# EAGLE board fire alarm (EAGLE 6.5.0)
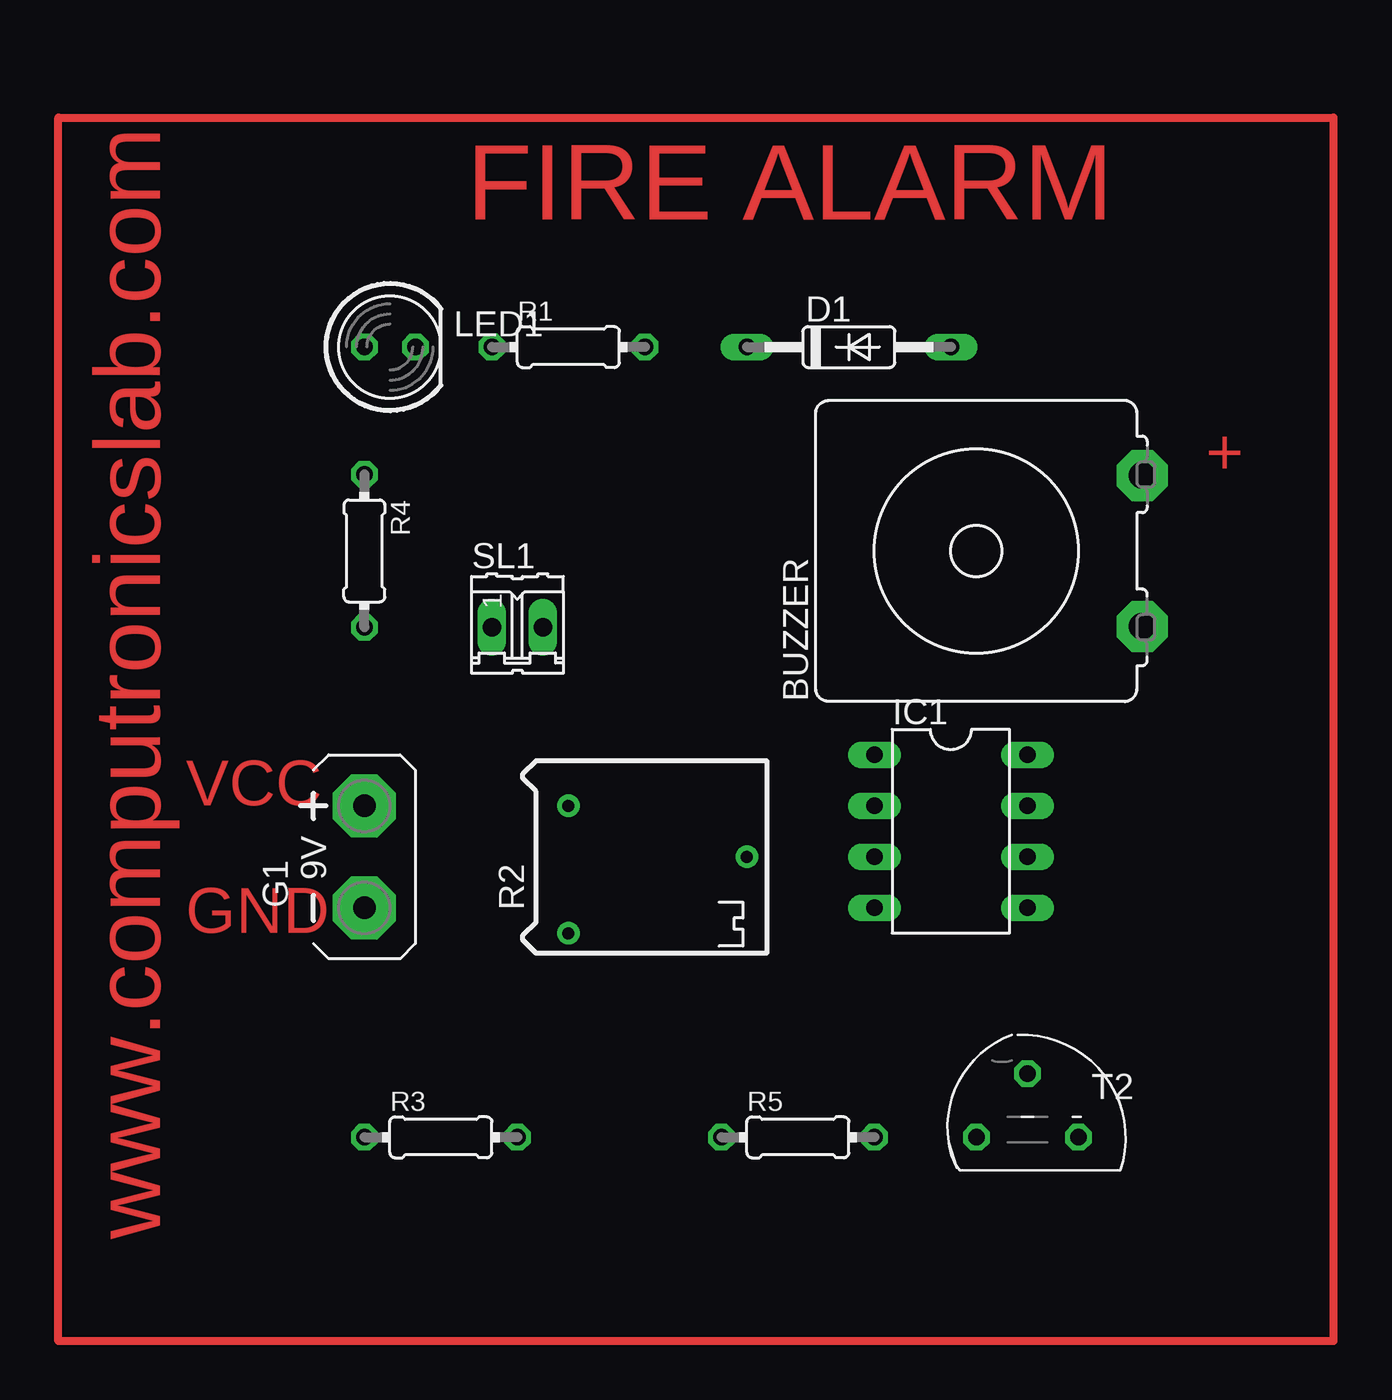
[diagram p0: board, top side]
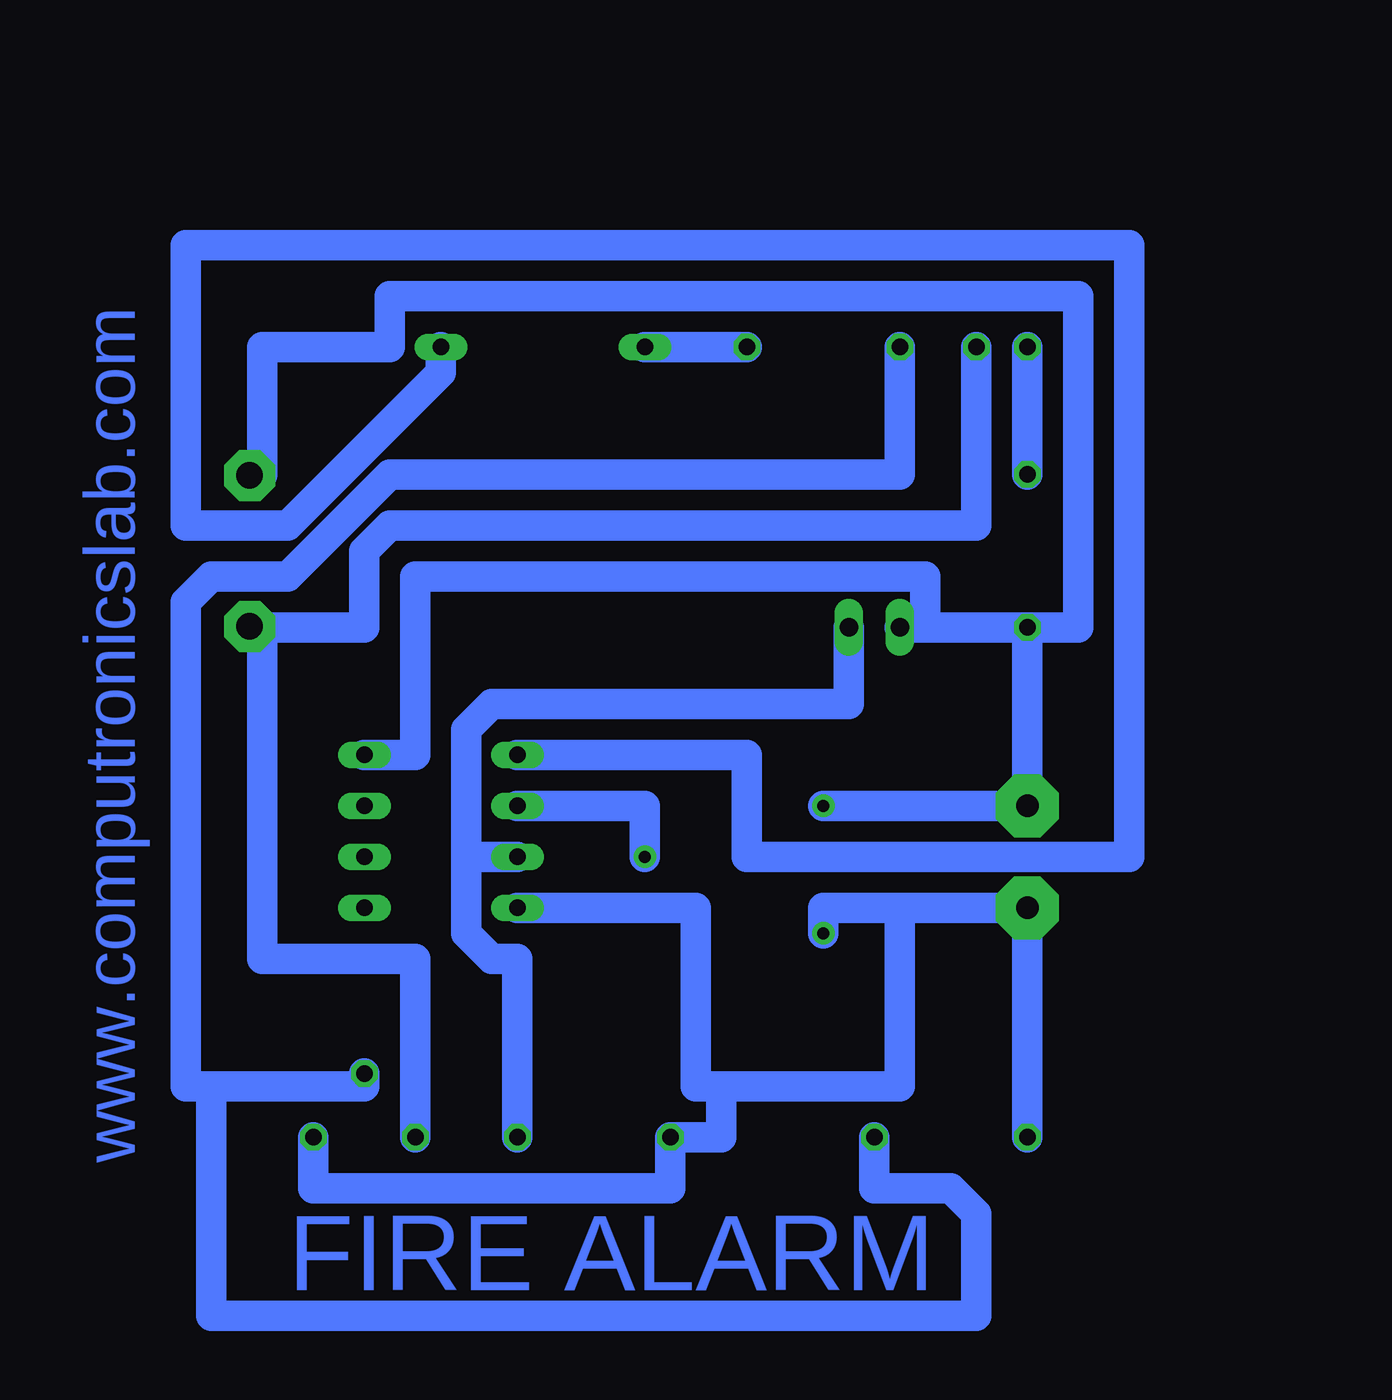
[diagram p1: board, bottom side, seen from below]

No outline drawn. Coordinates in mm, seen from the top.
Copper layers (1*16): Top 0.035mm / dielectric 1.5mm / Bottom 0.035mm
Design rules "default *": minimum track width 60mil, minimum drill 24mil, track to track 8mil, track to pad 8mil, pad to pad 8mil, via to via 8mil, smd to smd 8mil, copper to edge 40mil, drill to drill 8mil, minimum pad ring 10mil, minimum via ring 8mil, stop-mask expansion 4mil, vias tented up to drill 0mil, thermal gap 10mil

## Footprints (pad centres in the part's own frame; a part is rotated, then mirrored left to right if it is on the bottom)
B/C11L = drill 1.321 pad 2.54 octagon: 1 -3.759,-8.255; 2 3.759,-8.255
DO35-10 = drill 0.813 long: A 5.08,0; C -5.08,0
AB9V = drill 1.118 pad 3.15 octagon: + 0,2.54; - 0,-2.54
DIL-08 = drill 0.813 long: 1 -3.81,-3.81; 2 -1.27,-3.81; 3 1.27,-3.81; 4 3.81,-3.81; 5 3.81,3.81; 6 1.27,3.81; 7 -1.27,3.81; 8 -3.81,3.81
LED5MM = drill 0.813 octagon: A -1.27,0; K 1.27,0
0204/7 = drill 0.813 octagon: 1 -3.81,0; 2 3.81,0
RTRIM64P = drill 0.61: 1 -2.54,-3.81; 2 6.35,0; 3 -2.54,2.54
02P = drill 0.914 long: 1 -1.27,0; 2 1.27,0
TO92 = drill 0.813 octagon: 1 2.54,-1.27; 2 0,1.905; 3 -2.54,-1.27

## Placement (x,y rotation side)
BUZZER  B/C11L  [B/C11L]  38.1,63.5 90 top
D1  1N4007S  [DO35-10]  31.75,73.66 0 top
G1  AB9V  [AB9V]  7.62,48.26 0 top
IC1  LM358  [DIL-08]  36.83,49.53 270 top
LED1  5mm  [LED5MM]  8.89,73.66 0 top
R1  10k  [0204/7]  17.78,73.66 0 top
R2  500K  [RTRIM64P]  20.32,48.26 0 top
R3  10K  [0204/7]  11.43,34.29 0 top
R4  220E  [0204/7]  7.62,63.5 270 top
R5  100K  [0204/7]  29.21,34.29 0 top
SL1  NTC104  [02P]  15.24,59.69 0 top
T2  BC547  [TO92]  40.64,35.56 0 top

## Library data of the parts
BUZZER = buzzer; OC_FARNELL: unknown; OC_NEWARK: unknown
D1 = diode
G1 = battery
IC1 = st-microelectronics; MF: Arrow Electronics; MPN: NE555N; OC_FARNELL: 1467742; OC_NEWARK: 89K1486
LED1 = led
R1 R3-R5 = eagle-ltspice; SPICEMODEL: NONE; SPICEPREFIX: R
R2 = resistor
SL1 = con-amp-quick; OC_FARNELL: unknown; OC_NEWARK: unknown
T2 = transistor

## Nets
N$1: D1.A IC1.1
N$2: D1.C R1.2
N$3: R1.1 R3.2 T2.2
N$4: G1.- IC1.4 R2.1 R3.1 R5.1 T2.1
N$5: BUZZER.1 LED1.K T2.3
N$8: LED1.A R4.1
N$9: IC1.2 R2.2
N$11: IC1.3 R5.2 SL1.2
N$13: BUZZER.2 G1.+ IC1.8 R2.3 R4.2 SL1.1

## Tracks (layer width: path | path; a pad name or v marks a point on that pad's centre or on a via)
N$1
  Bottom 1.524: IC1.1 22.86,53.34 21.59,53.34 21.59,48.26 17.78,48.26 6.35,48.26 2.54,48.26 2.54,49.53 2.54,52.07 2.54,78.74 49.53,78.74 49.53,64.77 44.45,64.77 36.83,72.39 D1.A
N$2
  Bottom 1.524: D1.C R1.2
N$3
  Bottom 1.524: R3.2 15.24,31.75 12.7,31.75 11.43,31.75 10.16,30.48 10.16,25.4 48.26,25.4 48.26,36.83 | 48.26,36.83 40.64,36.83 T2.2 | R1.1 13.97,68.58 13.97,67.31 20.32,67.31 39.37,67.31 44.45,62.23 48.26,62.23 49.53,60.96 49.53,36.83 48.26,36.83
N$4
  Bottom 1.524: R2.1 17.78,45.72 16.51,45.72 13.97,45.72 | 13.97,45.72 G1.- R3.1 | 13.97,45.72 13.97,39.37 13.97,36.83 22.86,36.83 | 22.86,36.83 22.86,34.29 R5.1 25.4,31.75 27.94,31.75 40.64,31.75 43.18,31.75 T2.1 | IC1.4 24.13,45.72 24.13,36.83 22.86,36.83
N$5
  Bottom 1.524: T2.3 38.1,43.18 45.72,43.18 45.72,59.69 | LED1.K 10.16,64.77 39.37,64.77 40.64,63.5 40.64,59.69 44.45,59.69 45.72,59.69 | 45.72,59.69 BUZZER.1
N$6
  Top 0.406: -7.62,24.13 -7.62,85.09 55.88,85.09 55.88,24.13 -7.62,24.13
N$8
  Bottom 1.524: LED1.A R4.1
N$9
  Bottom 1.524: R2.2 26.67,49.53 26.67,50.8 29.21,50.8 IC1.2
N$11
  Bottom 1.524: R5.2 33.02,43.18 34.29,43.18 35.56,44.45 35.56,48.26 | IC1.3 35.56,48.26 | SL1.2 16.51,55.88 20.32,55.88 34.29,55.88 35.56,54.61 35.56,48.26
N$13
  Bottom 1.524: R2.3 G1.+ R4.2 | SL1.1 12.7,59.69 | 12.7,59.69 R4.2 | IC1.8 38.1,53.34 38.1,62.23 12.7,62.23 12.7,59.69 | R4.2 5.08,59.69 5.08,76.2 39.37,76.2 39.37,73.66 45.72,73.66 45.72,67.31 BUZZER.2

## Text on the board
Top: FIRE ALARM | + | VCC | GND | www.computronicslab.com
Bottom: www.computronicslab.com | FIRE ALARM